# EAGLE board MainSystem v4 (EAGLE 9.7.0)
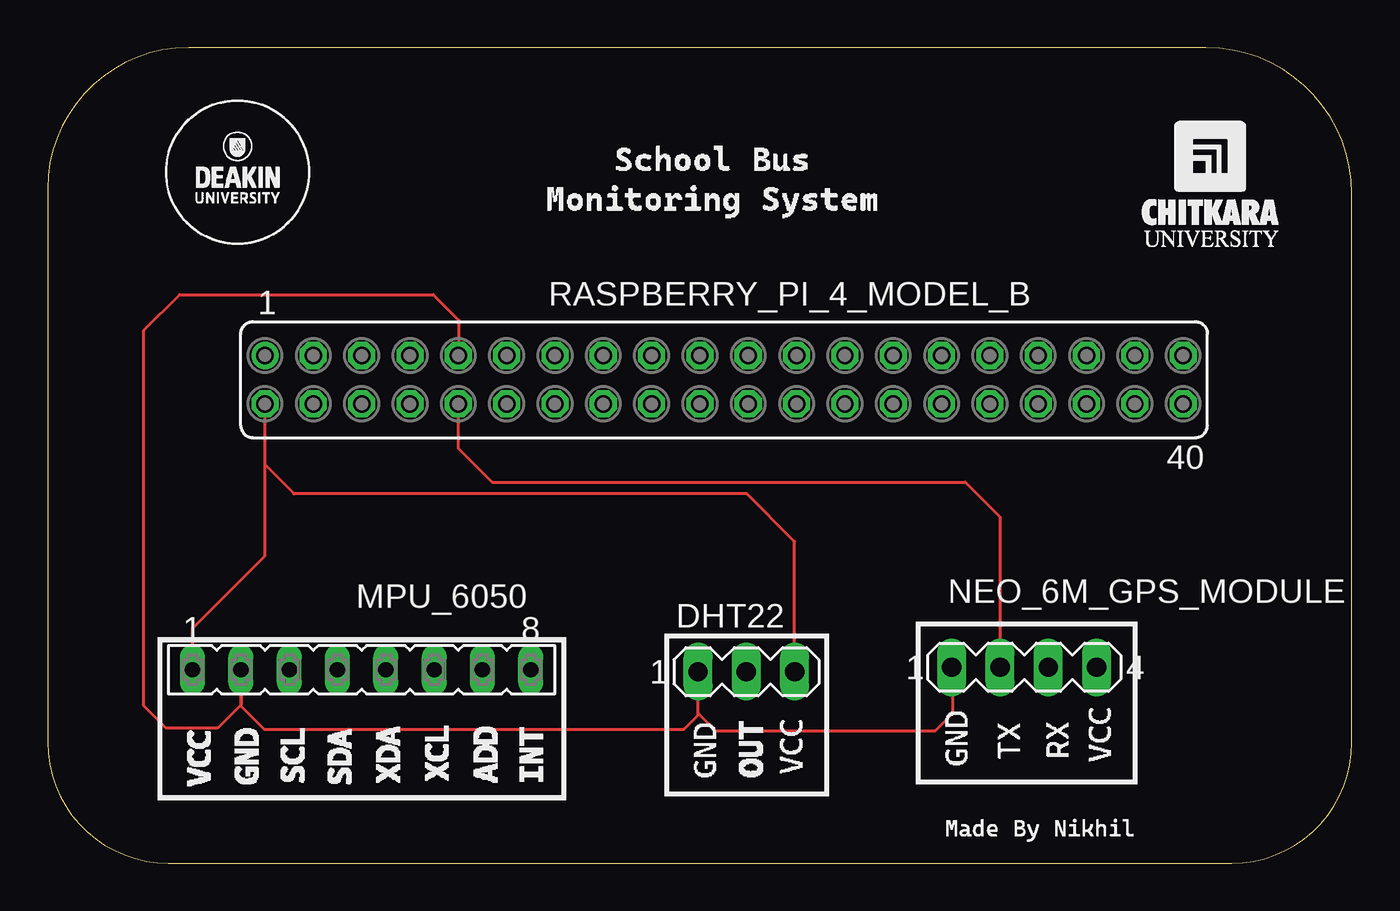
[diagram p0: board, top side]
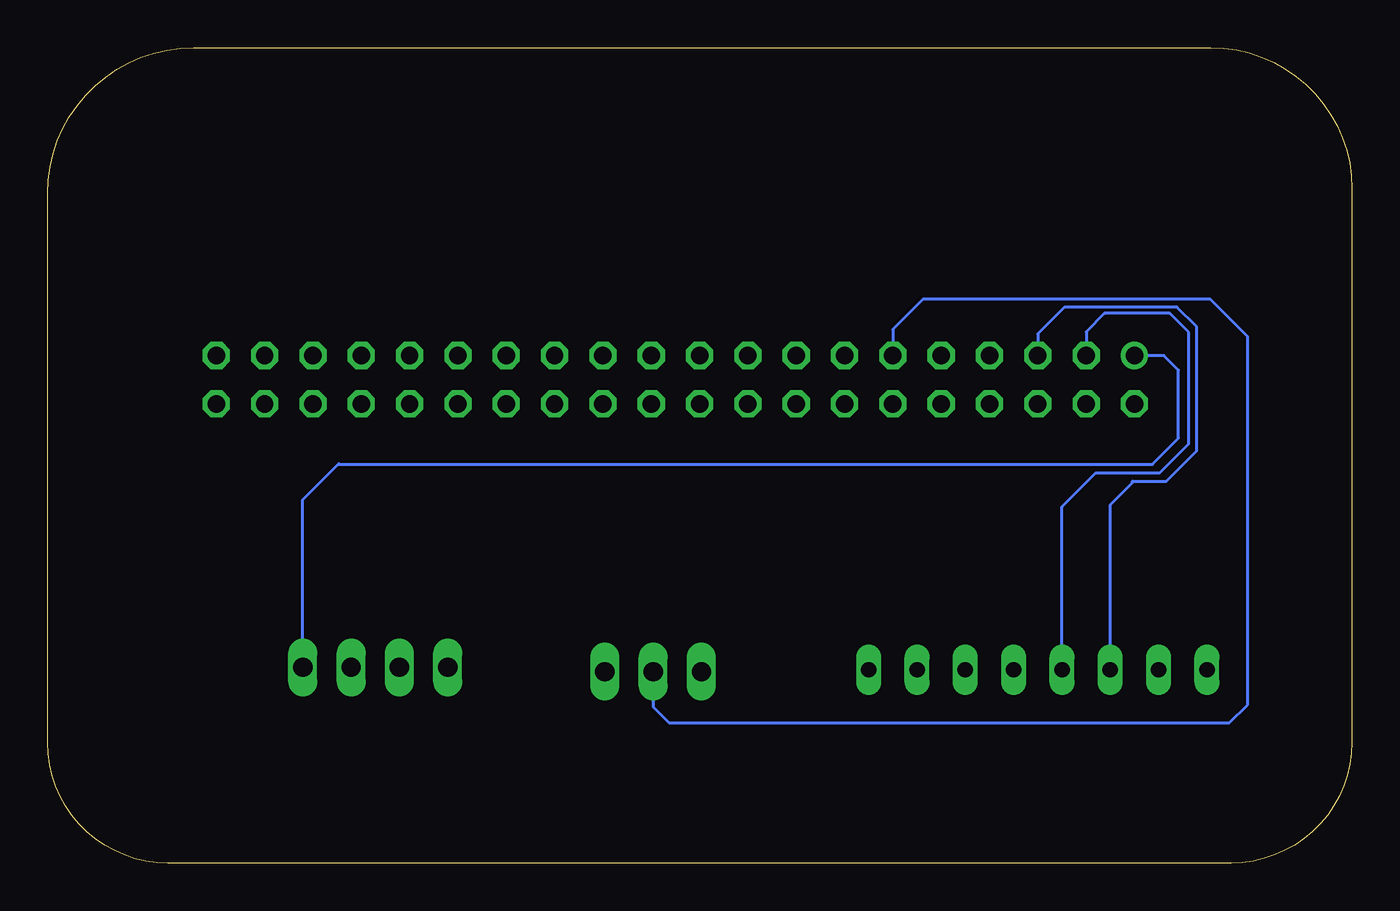
[diagram p1: board, bottom side, seen from below]

Size 68.56 x 42.85 mm. Coordinates in mm from the lower left corner, seen from the top.
Outline: 68.56,6.32 68.56,35.17 arc90 60.88,42.85 7.43,42.85 arc90 0,35.42 0,6.35 arc90 6.35,0 62.24,0 arc90 68.56,6.32
Copper layers (1*16): Top / Bottom
Stack-up Default Layer Stack: Top User Defined 0.035mm / Dielectric-1 User Defined 1.5mm / Bottom User Defined 0.035mm
Design rules "default": minimum track width 6mil, minimum drill 0.35mm, track to track 6mil, track to pad 6mil, pad to pad 6mil, via to via 6mil, smd to smd 6mil, copper to edge 40mil, drill to drill 6mil, minimum pad ring 10mil, minimum via ring 8mil, stop-mask expansion 4mil, vias tented up to drill 0mil, thermal gap 10mil

## Footprints (pad centres in the part's own frame; a part is rotated, then mirrored left to right if it is on the bottom)
MA03-1 = drill 1.016 long: 1 -2.54,0; 2 0,0; 3 2.54,0
FE08 = drill 0.813 long: 1 -8.89,0; 2 -6.35,0; 3 -3.81,0; 4 -1.27,0; 5 1.27,0; 6 3.81,0; 7 6.35,0; 8 8.89,0
MA04-1 = drill 1.016 long: 1 -3.81,0; 2 -1.27,0; 3 1.27,0; 4 3.81,0
FE20-2 = drill 0.914: 1 -24.13,1.27 | drill 0.914 octagon: 2 -24.13,-1.27; 3 -21.59,1.27; 4 -21.59,-1.27; 5 -19.05,1.27; 6 -19.05,-1.27; 7 -16.51,1.27; 8 -16.51,-1.27; 9 -13.97,1.27; 10 -13.97,-1.27; 11 -11.43,1.27; 12 -11.43,-1.27; 13 -8.89,1.27; 14 -8.89,-1.27; 15 -6.35,1.27; 16 -6.35,-1.27; 17 -3.81,1.27; 18 -3.81,-1.27; 19 -1.27,1.27; 20 -1.27,-1.27; 21 1.27,1.27; 22 1.27,-1.27; 23 3.81,1.27; 24 3.81,-1.27; 25 6.35,1.27; 26 6.35,-1.27; 27 8.89,1.27; 28 8.89,-1.27; 29 11.43,1.27; 30 11.43,-1.27; 31 13.97,1.27; 32 13.97,-1.27; 33 16.51,1.27; 34 16.51,-1.27; 35 19.05,1.27; 36 19.05,-1.27; 37 21.59,1.27; 38 21.59,-1.27; 39 24.13,1.27; 40 24.13,-1.27

## Placement (x,y rotation side)
DHT22  [MA03-1]  36.73,10.06 0 top
MPU_6050  [FE08]  16.51,10.16 0 top
NEO_6M_GPS_MODULE  [MA04-1]  51.33,10.29 0 top
RASPBERRY_PI_4_MODEL_B  [FE20-2]  35.56,25.4 0 top

## Library data of the parts
DHT22 NEO_6M_GPS_MODULE = con-lstb; OC_FARNELL: unknown; OC_NEWARK: unknown
MPU_6050 RASPBERRY_PI_4_MODEL_B = con-lsta; OC_FARNELL: unknown; OC_NEWARK: unknown

## Nets
GND: DHT22.1 MPU_6050.2 NEO_6M_GPS_MODULE.1 RASPBERRY_PI_4_MODEL_B.9
N$1: MPU_6050.3 RASPBERRY_PI_4_MODEL_B.5
N$2: MPU_6050.4 RASPBERRY_PI_4_MODEL_B.3
OUT: DHT22.2 RASPBERRY_PI_4_MODEL_B.11
TX: NEO_6M_GPS_MODULE.2 RASPBERRY_PI_4_MODEL_B.10
VCC: DHT22.3 MPU_6050.1 RASPBERRY_PI_4_MODEL_B.2
VDD: NEO_6M_GPS_MODULE.4 RASPBERRY_PI_4_MODEL_B.1

## Tracks (layer width: path | path; a pad name or v marks a point on that pad's centre or on a via)
GND
  Top 0.152: 34.19,7.87 34.19,7.77 33.45,7.04 11.38,7.04 10.16,8.25 MPU_6050.2 10.19,10.13 10.19,8.33 8.94,7.09 6.22,7.09 5.06,8.25 5.06,27.99 6.93,29.87 20.27,29.87 21.62,28.52 21.62,26.7 RASPBERRY_PI_4_MODEL_B.9 | 34.19,7.87 DHT22.1 | 34.19,7.87 35.1,6.96 46.66,6.96 47.57,7.87 47.57,10.24 NEO_6M_GPS_MODULE.1
N$1
  Bottom 0.152: MPU_6050.3 12.7,18.82 11.53,19.99 11.53,20.07 9.75,20.07 8.18,21.64 | 8.18,21.69 8.18,21.64 | 8.18,21.64 8.15,21.67 8.15,28.17 9.2,29.21 15.11,29.21 16.51,27.81 RASPBERRY_PI_4_MODEL_B.5
N$2
  Bottom 0.152: MPU_6050.4 15.24,18.72 13.46,20.5 10.11,20.5 8.59,22.02 8.59,27.89 9.58,28.88 13.01,28.88 13.97,27.91 RASPBERRY_PI_4_MODEL_B.3
OUT
  Bottom 0.152: DHT22.2 36.73,8.2 35.89,7.37 6.45,7.37 5.49,8.33 5.49,27.66 7.44,29.62 22.56,29.62 24.13,28.04 RASPBERRY_PI_4_MODEL_B.11
TX
  Top 0.152: RASPBERRY_PI_4_MODEL_B.10 21.59,21.79 23.37,20.01 48.24,20.01 50.06,18.19 NEO_6M_GPS_MODULE.2
VCC
  Top 0.152: MPU_6050.1 7.62,12.34 11.43,16.15 11.43,20.93 | DHT22.3 39.27,16.89 36.75,19.41 12.95,19.41 11.43,20.93 | 11.43,20.93 RASPBERRY_PI_4_MODEL_B.2
VDD
  Bottom 0.152: NEO_6M_GPS_MODULE.4 55.14,19.1 53.29,20.95 | 53.29,20.95 53.24,21.01 | 53.29,20.95 10.49,20.95 9.12,22.33 9.12,25.91 9.88,26.67 RASPBERRY_PI_4_MODEL_B.1

## Text on the board
tPlace: C:/Users/Nikhi/Desktop/DHT 22.bmp | C:/Users/Nikhi/Desktop/MPU 6050.bmp | C:/Users/Nikhi/Desktop/NEO 6M GPS Module.bmp | C:/Users/Nikhi/Desktop/OnBoardingSystem/Images/Deakin Logo.bmp | C:/Users/Nikhi/Desktop/OnBoardingSystem/Images/chitkara logo.bmp | C:/Users/Nikhi/Desktop/school bus monitoring system logo.bmp